# Altium PCB RPi_sensor_expansion_board.PcbDoc
Units mm, origin at the board's own origin, x right, y up, seen from the top; angles counter-clockwise.
Board outline 85.09 x 56.01 mm, 2 copper layers (Top Layer, Bottom Layer); 63 components, 60 nets, 293 pads, 133 vias.
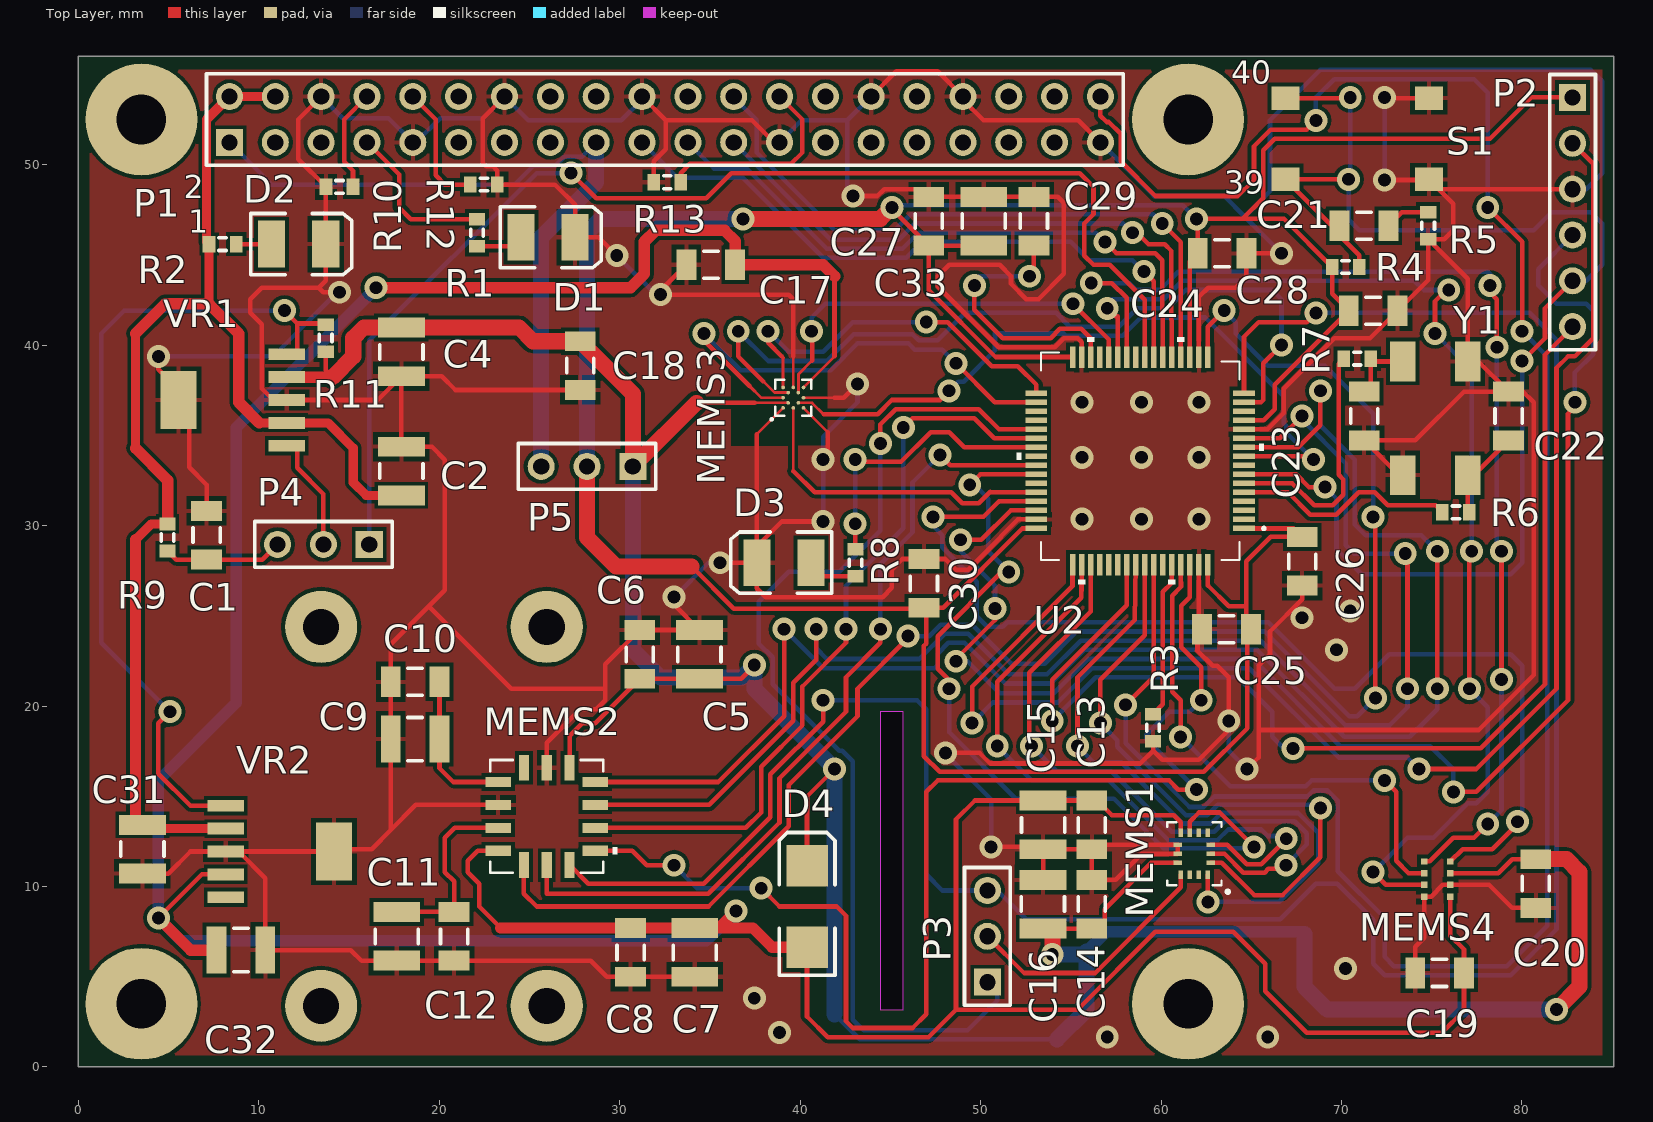
[diagram p0: Top Layer view]
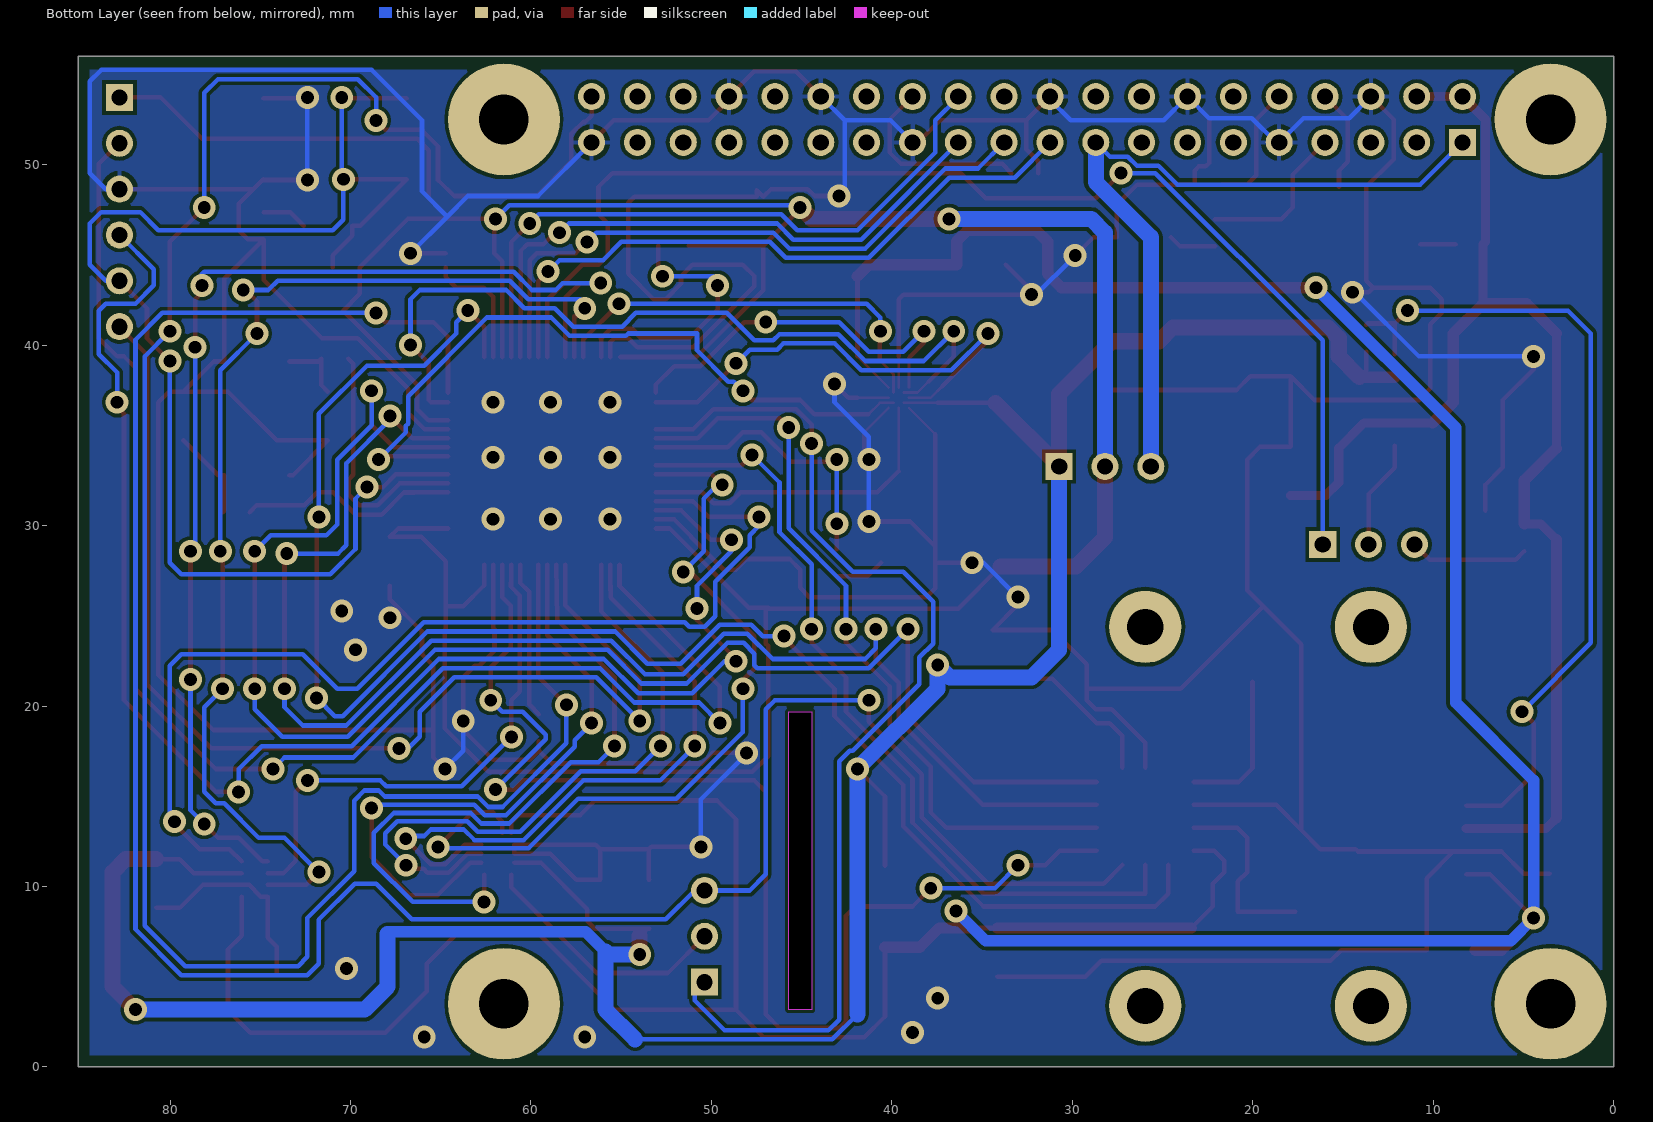
[diagram p1: Bottom Layer view, seen from below]

## Layer stack, top to bottom
Top Solder: solder mask 0.0102, Solder Resist, Dk 3.5
Top Layer: signal copper 0.0356
Dielectric 1: dielectric 0.32, FR-4, Dk 4.8
Bottom Layer: signal copper 0.0356
Bottom Solder: solder mask 0.0102, Solder Resist, Dk 3.5

## Board outline
0,0 85.09,0 85.09,56.007 0,56.007
cut-out: 44.45,3.175 45.72,3.175 45.72,19.685 44.45,19.685

## Design rules (kind name [scope] priority, off if disabled: settings)
Clearance [All] p1: gap=0.203 ignorepadtopadclearanceinfootprint=FALSE
HoleSize [All] p1: absolutevalues=TRUE maxlimit=4.978 minlimit=0.025 maxpercent=80.000 minpercent=20.000
MinimumSolderMaskSliver [All] p1: minsoldermaskwidth=0.091
PlaneConnect [All] p1: pad.planeconnectstyle=Relief pad.reliefexpansion=0.508 pad.reliefentries=4 pad.reliefconductorwidth=0.254 pad.reliefairgap=0.254 via.planeconnectstyle=Direct via.reliefexpansion=0.508 via.reliefentries=4 via.reliefconductorwidth=0.254 via.reliefairgap=0.254
PolygonConnect [All] p1: thpad.connectstyle=Relief thpad.reliefconductorwidth=0.254 thpad.reliefentries=4 thpad.polygonreliefangle="90 Angle" thpad.airgapwidth=0.254 smdpad.connectstyle=Relief smdpad.reliefconductorwidth=0.254 smdpad.reliefentries=4 smdpad.polygonreliefangle="90 Angle" smdpad.airgapwidth=0.254 via.connectstyle=Direct via.reliefconductorwidth=0.254 via.reliefentries=4 via.polygonreliefangle="90 Angle" via.airgapwidth=0.254
RoomDefinition Accelerometer [InComponentClass('Accelerometer')] p1 off: confinementstyle=ConfineIn formatcopy=TRUE lockcomponents=FALSE outline 0,0 50.8,0 50.8,25.4 0,25.4
RoutingVias [All] p1: holewidth=0.711 width=1.27 viastyle="Through Hole" minholewidth=0.711 minwidth=1.27 maxholewidth=0.711 maxwidth=1.27
SolderMaskExpansion [All] p1: expansion=0.051
Width [All] p1: maxlimit=0.889 minlimit=0.152 preferedwidth=0.254
27 further rules are at their usual default settings.

## Classes and differential pairs
component class top: P3 P5
component class STM32: C21 C22 C23 C24 C25 C26 C27 C28 C29 C30 C33 D3 P2 R3 R4 R5 R6 R7 R8 S1 U2 Y1
component class RPi_connector: D1 D2 P1 R1 R2 R10 R12 R13
component class Power: C1 C2 C4 C31 C32 D4 P4 R9 R11 VR1 VR2
component class Magnetometer: C17 C18 MEMS3
component class Gyroscope: C13 C14 C15 C16 MEMS1
component class barometer: C19 C20 MEMS4
component class Accelerometer: C5 C6 C7 C8 C9 C10 C11 C12 MEMS2

## Components (designator, comment, footprint, x,y, rotation, side; value= is the part's Value field where it differs from the comment)
C1 "Cap Semi" C1206 7.112,29.464 r270 top value=100nF
C2 "Cap Semi" C1210 17.907,33.02 r270 top value=10uF
C4 "Cap Semi" C1210 17.907,39.624 r90 top value=10uF
C5 "Cap Semi" C1210 34.417,22.86 r270 top value=1uF
C6 "Cap Semi" C1206 31.115,22.86 r270 top value=0.1uF
C7 "Cap Semi" C1210 34.163,6.35 r90 top value=1uF
C8 "Cap Semi" C1206 30.607,6.35 r90 top value=0.1uF
C9 "Cap Semi" C1210 18.669,18.161 r0 top value=1uF
C10 "Cap Semi" C1206 18.669,21.336 r0 top value=0.1uF
C11 "Cap Semi" C1210 17.653,7.239 r90 top value=1uF
C12 "Cap Semi" C1206 20.828,7.239 r90 top value=0.1uF
C13 "Cap Semi" C1206 56.171,13.415 r90 top value=100nF
C14 "Cap Semi" C1206 56.158,9.017 r270 top value=100nF
C15 "Cap Semi" C1210 53.467,13.415 r90 top value=1uF
C16 "Cap Semi" C1210 53.453,9.017 r270 top value=1uF
C17 "Cap Semi" C1206 35.052,44.45 r0 top value=100nF
C18 "Cap Semi" C1206 27.813,38.862 r90 top value=100nF
C19 "Cap Semi" C1206 75.438,5.207 r0 top value=0.1uF
C20 "Cap Semi" C1206 80.772,10.16 r90 top value=0.1uF
C21 "Cap Semi" C1206 71.247,46.609 r180 top value=100nF
C22 "Cap Semi" C1206 79.26,36.068 r270 top value=12pF
C23 "Cap Semi" C1206 71.259,36.068 r90 top value=12pF
C24 "Cap Semi" C1206 63.385,45.085 r0 top value=100nF
C25 "Cap Semi" C1206 63.627,24.257 r180 top value=100nF
C26 "Cap Semi" C1206 67.818,28.02 r270 top value=100nF
C27 "Cap Semi" C1206 47.129,46.863 r90 top value=100nF
C28 "Cap Semi" C1206 71.755,41.91 r0 top value=100nF
C29 "Cap Semi" C1206 52.959,46.863 r270 top value=4.7pF
C30 "Cap Semi" C1206 46.863,26.797 r270 top value=100nF
C31 "Cap Semi" C1210 3.556,12.065 r90 top value=10uF
C32 "Cap Semi" C1210 9.017,6.477 r180 top value=10uF
C33 "Cap Semi" C1210 50.177,46.863 r90 top value=10uF
D1 "LED3" 3.5X2.8X1.9 26.035,45.974 r0 top
D2 "LED3" 3.5X2.8X1.9 12.216,45.593 r0 top
D3 "LED3" 3.5X2.8X1.9 39.104,27.94 r180 top
D4 "D Schottky" SMB 40.386,8.89 r90 top
MEMS1 "BMG250" LGA14-BOSCH 61.849,11.811 r180 top
MEMS2 "ADXL355BEZ" E_14_1 25.962,13.884 r0 top value=Value
MEMS3 "BMA150" BGA12-BOSCH 39.624,37.084 r180 top
MEMS4 "DPS310" PG-VLGA-8-1 75.311,10.414 r90 top
P1 "Header 20X2" HDR2X20 8.382,51.232 r0 top
P2 "Header 6" HDR1X6 82.804,53.721 r270 top
P3 "SYNC_SEL" HDR1X3 50.379,4.699 r90 top
P4 "EN_SRC_SEL" HDR1X3 16.129,28.956 r180 top
P5 "UC_PWR_SEL" HDR1X3 30.734,33.274 r180 top
R1 "Res3" J1-0603 22.098,46.228 r90 top value=200
R2 "Res3" J1-0603 8.001,45.593 r180 top value=400
R3 "Res3" J1-0603 59.563,18.796 r90 top value=10K
R4 "Res3" J1-0603 70.231,44.323 r180 top value=4.7K
R5 "Res3" J1-0603 74.803,46.609 r90 top value=100R
R6 "Res3" J1-0603 76.339,30.734 r180 top value=0R
R7 "Res3" J1-0603 70.878,39.243 r180 top value=0R
R8 "Res3" J1-0603 43.065,27.94 r90 top value=200
R9 "Res3" J1-0603 4.953,29.337 r270 top value=10k
R10 "Res3" J1-0603 14.478,48.768 r180 top value=1K
R11 "Res3" J1-0603 13.716,40.386 r90 top value=10k
R12 "Res3" J1-0603 22.479,48.895 r0 top value=1K
R13 "Res3" J1-0603 32.639,49.022 r180 top value=1K
S1 "SW-DPST" TACT_SWITCH 70.866,51.435 r0 top
U2 "STM32F4x1R1" LQFP64-10x10mm 58.848,33.588 r180 top value=Value
VR1 "MCP1825" SOT-223-6 8.557,36.957 r90 top
VR2 "MCP1825" SOT-223-6 11.176,11.938 r270 top
Y1 "LFXTAL026380" 12SMX-B 75.196,35.941 r90 top

## Footprints (in the part's own frame and the unit in brackets; to place one, negate y for a bottom-side part, rotate by r counter-clockwise, add the part's x,y. Pads: shape width x height; smd on the part's side, far side on the other; paste and mask are expansions set on the pad)
3.5X2.8X1.9 [mm] "SM LED; 2 C-Bend Leads; Body 3.5 x 2.8 x 1.9 mm, inc leads (LxWxH typ)"
  rect 1.5x2.6 smd: 1(-1.5,0) 2(1.5,0)
  silkscreen extent -2.65,-1.7 2.95,1.7
12SMX-B [mm] "B-type 12SMX crystal package"
  rect 2.2x1.4 smd: 1(3.15,1.8) 2(3.15,-1.8) 3(-3.15,-1.8) 4(-3.15,1.8)
  body extent -3.5,-2.5 3.5,2.5, height 1.31
BGA12-BOSCH [mm]
  round 0.2 smd: A1(0.566,0.566) A3(0.566,0) A5(0.566,-0.566) B2(0.283,0.283) B4(0.283,-0.283) C1(0,0.566) C5(0,-0.566) D2(-0.283,0.283) D4(-0.283,-0.283) E1(-0.566,0.566) E3(-0.566,0) E5(-0.566,-0.566)
  silkscreen extent -1,-1 1.26,1.26, body extent -0.77,-0.78 0.78,0.78, height 0.65
C1206 [mm] "Chip Capacitor, Body 3.2x1.6mm, IPC High Density"
  rect 1.1x1.7 smd: 1(-1.35,0) 2(1.35,0)
  silkscreen extent -0.4,-0.75 0.4,0.75, body extent -1.7,-0.9 1.7,0.9, height 1.3
C1210 [mm] "Chip Capacitor, Body 3.2x2.5mm, IPC High Density"
  rect 1.1x2.6 smd: 1(-1.35,0) 2(1.35,0)
  silkscreen extent -0.4,-1.2 0.4,1.2, body extent -1.7,-1.35 1.7,1.35, height 1.3
E_14_1 [mil]
  rect 55.98x22 smd: 1(106.12,-75) 2(106.12,-25) 3(106.12,25) 4(106.12,75) 8(-106.12,75) 9(-106.12,25) 10(-106.12,-25) 11(-106.12,-75)
  rect 22x55.98 smd: 5(50,106.12) 6(0,106.12) 7(-50,106.12) 12(-50,-106.12) 13(0,-106.12) 14(50,-106.12)
  silkscreen extent -123,-123 154,123, body extent -118,-118 118,118, height 98
HDR1X3 [mm] "Connector; Header; 3 Position"
  rect 1.5x1.5 hole 0.9: 1(0,0)
  round 1.5 hole 0.9: 2(2.54,0) 3(5.08,0)
  silkscreen extent -1.27,-1.27 6.35,1.27
HDR1X6 [mm] "Connector; Header; 6 Position"
  rect 1.5x1.5 hole 0.9: 1(0,0)
  round 1.5 hole 0.9: 2(2.54,0) 3(5.08,0) 4(7.62,0) 5(10.16,0) 6(12.7,0)
  silkscreen extent -1.27,-1.27 13.97,1.27
HDR2X20 [mm] "Connector; Header; 20x2 Position"
  rect 1.5x1.5 hole 0.9: 1(0,0)
  round 1.5 hole 0.9: 2(0,2.54) 3(2.54,0) 4(2.54,2.54) 5(5.08,0) 6(5.08,2.54) 7(7.62,0) 8(7.62,2.54) 9(10.16,0) 10(10.16,2.54) 11(12.7,0) 12(12.7,2.54) 13(15.24,0) 14(15.24,2.54) 15(17.78,0) 16(17.78,2.54) 17(20.32,0) 18(20.32,2.54) 19(22.86,0) 20(22.86,2.54) 21(25.4,0) 22(25.4,2.54) 23(27.94,0) 24(27.94,2.54) 25(30.48,0) 26(30.48,2.54) 27(33.02,0) 28(33.02,2.54) 29(35.56,0) 30(35.56,2.54) 31(38.1,0) 32(38.1,2.54) 33(40.64,0) 34(40.64,2.54) 35(43.18,0) 36(43.18,2.54) 37(45.72,0) 38(45.72,2.54) 39(48.26,0) 40(48.26,2.54)
  silkscreen extent -1.27,-1.27 49.53,3.81
J1-0603 [mm] "Chip Resistor, Body 1.6x0.8mm, IPC High Density"
  rect 0.7x0.9 smd: 1(-0.75,0) 2(0.75,0)
  silkscreen extent -0.2,-0.35 0.2,0.35, body extent -0.85,-0.48 0.85,0.48, height 0.9
LGA14-BOSCH [mm]
  rect 0.25x0.475 smd: 1(-0.75,1.165) 2(-0.25,1.165) 3(0.25,1.165) 4(0.75,1.165) 8(0.75,-1.165) 9(0.25,-1.165) 10(-0.25,-1.165) 11(-0.75,-1.165)
  rect 0.475x0.25 smd: 5(0.915,0.5) 6(0.915,0) 7(0.915,-0.5) 12(-0.915,-0.5) 13(-0.915,0) 14(-0.915,0.5)
  silkscreen extent -1.9,-1.75 1.5,2.15, body extent -1.25,-1.5 1.25,1.5, height 1
LQFP64-10x10mm [mm]
  rect 1.194x0.305 smd: 1(-5.75,3.75) 2(-5.75,3.25) 3(-5.75,2.75) 4(-5.75,2.25) 5(-5.75,1.75) 6(-5.75,1.25) 7(-5.75,0.75) 8(-5.75,0.25) 9(-5.75,-0.25) 10(-5.75,-0.75) 11(-5.75,-1.25) 12(-5.75,-1.75) 13(-5.75,-2.25) 14(-5.75,-2.75) 15(-5.75,-3.25) 16(-5.75,-3.75) 33(5.75,-3.75) 34(5.75,-3.25) 35(5.75,-2.75) 36(5.75,-2.25) 37(5.75,-1.75) 38(5.75,-1.25) 39(5.75,-0.75) 40(5.75,-0.25) 41(5.75,0.25) 42(5.75,0.75) 43(5.75,1.25) 44(5.75,1.75) 45(5.75,2.25) 46(5.75,2.75) 47(5.75,3.25) 48(5.75,3.75)
  rect 0.305x1.194 smd: 17(-3.75,-5.75) 18(-3.25,-5.75) 19(-2.75,-5.75) 20(-2.25,-5.75) 21(-1.75,-5.75) 22(-1.25,-5.75) 23(-0.75,-5.75) 24(-0.25,-5.75) 25(0.25,-5.75) 26(0.75,-5.75) 27(1.25,-5.75) 28(1.75,-5.75) 29(2.25,-5.75) 30(2.75,-5.75) 31(3.25,-5.75) 32(3.75,-5.75) 49(3.75,5.75) 50(3.25,5.75) 51(2.75,5.75) 52(2.25,5.75) 53(1.75,5.75) 54(1.25,5.75) 55(0.75,5.75) 56(0.25,5.75) 57(-0.25,5.75) 58(-0.75,5.75) 59(-1.25,5.75) 60(-1.75,5.75) 61(-2.25,5.75) 62(-2.75,5.75) 63(-3.25,5.75) 64(-3.75,5.75)
  silkscreen extent -6.93,-6.85 6.85,6.85, body extent -6,-6 6,6, height 1.56
PG-VLGA-8-1 [mm]
  rect 0.35x0.35 smd: 1(-0.975,0.725) 2(-0.325,0.725) 3(0.325,0.725) 4(0.975,0.725) 5(0.975,-0.725) 6(0.325,-0.725) 7(-0.325,-0.725) 8(-0.975,-0.725)
  body extent -1.25,-1 1.25,1, height 1.08
SMB [mm] "DO-214-AA/SMB; 2 C-Bend Leads; Body 5.3 x 3.6 mm, inc. leads (LxW)"
  rect 2.3x2.3 smd: 1(-2.25,0) 2(2.25,0)
  silkscreen extent -3.8,-1.55 4.1,1.55
SOT-223-6 [mm]
  rect 0.65x2 smd: 1(-2.54,-3) 2(-1.27,-3) 3(0,-3) 4(1.27,-3) 5(2.54,-3)
  rect 3.2x2 smd: 6(0,3)
  body extent -3.27,-3.63 3.27,3.63, height 1.8
TACT_SWITCH [mm] "6x6 mm SMT tact switch footprint"
  rect 1.55x1.3 smd: 1(-3.975,2.25) 2(3.975,2.25) 3(-3.975,-2.25) 4(3.975,-2.25)
  body extent -4,-3.25 4,3.25, height 5

## Part data
C1 C2 C4 C5 C6 C7 C8 C9 C10 C11 C12 C13 C14 C15 C16 C17 C18 C19 C20 C21 C22 C23 C24 C25 C26 C27 C28 C29 C30 C31 C32 C33: "Capacitor (Semiconductor SIM Model)", LatestRevisionDate=29-May-2009, LatestRevisionNote="IPC-7351 Footprint Added.", PackageDescription="Chip Capacitor", PackageReference=C1206, Published=8-Jun-2000, Publisher="Altium Limited"
D1 D2 D3: "Typical BLUE SiC LED", DatasheetVersion=16-Apr-2002, LatestRevisionDate=17-Dec-2003, LatestRevisionNote="PCB Footprint replaced.", PackageDescription="SM LED; 2 C-Bend Leads; Body 3.5 x 2.8 x 1.9 mm, inc leads (LxWxH typ)", PackageReference=3.5X2.8X1.9, PackageVersion=16-Apr-2002, Published=8-Jun-2000, Publisher="Altium Limited"
D4: "Schottky Diode", Code_JEDEC=DO-214-AA, LatestRevisionDate=17-Jul-2002, LatestRevisionNote="Re-released for DXP Platform.", PackageDescription="DO-214-AA/SMB; 2 C-Bend Leads; Body 5.3 x 3.6 mm, inc. leads (LxW)", PackageReference=SMB, Published=8-Jun-2000, Publisher="Altium Limited"
MEMS2: "Imported", RefDes=RefDes, Type=Type
P1: "Header, 20-Pin, Dual row", LatestRevisionDate=17-Jul-2002, LatestRevisionNote="Re-released for DXP Platform.", Publisher="Altium Limited"
P2: "Header, 6-Pin", LatestRevisionDate=17-Jul-2002, LatestRevisionNote="Re-released for DXP Platform.", Publisher="Altium Limited"
P3 P4 P5: library part "Header 3", "Header, 3-Pin", LatestRevisionDate=17-Jul-2002, LatestRevisionNote="Re-released for DXP Platform.", Publisher="Altium Limited"
R1 R2 R3 R4 R5 R6 R7 R8 R9 R10 R11 R12 R13: "Resistor", LatestRevisionDate=29-May-2009, LatestRevisionNote="IPC-7351 Footprint Added.", PackageDescription="Chip Resistor", PackageReference=J1-0603, Published=8-Jun-2000, Publisher="Altium Limited"
S1: "Double-Pole, Single-Throw Switch", LatestRevisionDate=17-Jul-2002, LatestRevisionNote="Re-released for DXP Platform.", PackageDescription="Switch; 4 Leads", PackageReference=DPST-4, Published=24-Mar-1999, Publisher="Altium Limited"
U2: "Imported", Manufacturer_Part_Number=stm32f4x1r1, C="Copyright (C) 2016 Accelerated Designs. All rights reserved", Copyright="Copyright (C) 2016 Accelerated Designs. All rights reserved", RefDes=RefDes, Type=Type, Vendor=STMicroelectronics
VR1 VR2: "3.3V Voltage regulator"

## Free pads (board coordinates)
  round 4 hole 2: 7(13.462,3.384) 8(25.962,3.384) 9(13.462,24.384) 10(25.962,24.384)
  round 6.2 hole 2.75: 11(3.5,3.5) 12(3.5,52.5) 13(61.5,52.5) 14(61.5,3.5)

## Via types
v1: diameter 1.27, hole 0.711, Top Layer to Bottom Layer, tented both sides, 100 vias
v2: diameter 1.27, hole 0.711, Top Layer to Bottom Layer, 17 vias
v3: diameter 1.27, hole 0.711, Top Layer to Bottom Layer, tented bottom, 16 vias

## Nets (pads, with @x,y where several pads share a name; then routed paths per layer and width w, separated by ;. In a path a pad name is that pad's centre, name@x,y a point inside that pad or via, vN(x,y) a via of type N, cw(c..) or ccw(c..) an arc to the next point about the centre after c; other vN are vias at no path point)
3V3_ANALOG: C7.2 C8.2 C13.2 C15.2 C17.2 C19.2 C32.2 D4.1 MEMS1.8 MEMS2.11 MEMS3.E5 MEMS4.8 VR2.4 | length 221.4
  Top Layer w0.152: MEMS3.E5 41.91,39.37
  Top Layer w0.254: v1(4.445,8.255) 6.858,10.668 VR2.4 ; MEMS2.11 22.139,11.979 21.59,11.43 21.59,10.795 22.225,10.16 22.225,8.89 23.415,7.7 ; C7.2 35.513,7.7 ; D4.1 40.386,2.794 41.529,1.651 47.117,1.651 48.641,3.175 ; 41.91,39.37 41.91,43.815 ; MEMS1.8 61.099,13.567 60.712,13.955 57.282,13.955 56.471,14.765 C13.2 C15.2 49.69,14.765 48.641,13.716 48.641,11.724 48.641,3.175 ; MEMS4.8 76.036,7.276 76.788,6.524 C19.2 76.788,3.128 75.565,1.905 68.072,1.905 65.786,4.191 65.786,5.715 64.008,7.493 59.69,7.493 55.372,3.175 48.641,3.175
  Top Layer w0.635: v1(4.445,8.255) 6.223,6.477 C32.2 ; v1(16.51,43.18) 30.607,43.18 31.369,43.942 31.369,45.72 32.004,46.355 35.814,46.355 36.402,45.767 C17.2 41.275,44.45 41.91,43.815 ; 23.415,7.7 C8.2 C7.2 ; v1(36.449,8.636) 35.513,7.7 37.385,7.7 38.445,6.64 D4.1
  Bottom Layer w0.635: v1(16.51,43.18) 8.763,35.433 8.763,20.193 4.445,15.875 v1(4.445,8.255) 5.715,6.985 34.798,6.985 v1(36.449,8.636)
3V3_DIGITAL: C4.2 C5.2 C6.2 C14.2 C16.2 C18.2 C20.2 D4.2 MEMS1.5 MEMS2.5 MEMS3.B2 MEMS4.6 P5.1 R11.1 VR1.4 | length 173.6
  Top Layer w0.152: 37.494,36.801 MEMS3.B2
  Top Layer w0.254: R11.1 13.716,38.608 14.097,38.227 ; MEMS2.5 27.232,18.342 27.94,19.05 28.655,19.05 C6.2 C5.2 36.75,21.51 37.465,22.225 v1(37.465,22.273) ; 34.261,36.801 37.494,36.801 ; D4.2 40.386,14.986 v3(41.91,16.51) ; C16.2 C16.2@53.552,7.667 ; C16.2@53.975,7.244 C16.2@53.552,7.667 ; MEMS1.5 59.444,11.311 56.881,8.748 56.881,8.09 56.458,7.667 C14.2 C16.2@53.552,7.667 ; MEMS4.6 78.684,10.739 79.455,11.51 C20.2
  Top Layer w0.635: VR1.4@12.144,38.227 14.097,38.227
  Top Layer w0.889: 14.097,38.227 15.24,39.37 15.24,40.386 15.828,40.974 C4.2 24.431,40.974 25.193,40.212 C18.2 30.734,37.291 P5.1 34.261,36.801 ; v2(53.975,6.223) C16.2@53.975,7.244 ; C20.2 82.47,11.51 83.185,10.795 83.185,4.445 v1(81.915,3.175)
  Bottom Layer w0.254: 41.91,2.921 43.307,1.524 54.229,1.524 ; 55.696,6.223 55.88,6.407 ; 67.945,7.366 67.945,7.493
  Bottom Layer w0.635: 55.88,6.407 56.966,7.493 67.945,7.493
  Bottom Layer w0.889: P5.1 30.734,23.114 32.258,21.59 36.782,21.59 v1(37.465,22.273) 37.465,20.955 v3(41.91,16.51) 41.91,2.921 ; v2(53.975,6.223) 55.696,6.223 ; 54.229,1.524 55.88,3.175 55.88,6.407 ; 67.945,7.366 67.945,4.445 69.215,3.175 v1(81.915,3.175)
5V_IN: C2.2 C31.2 P1.2 P1.4 R2.2 R9.1 VR1.2 VR2.2 | length 71.9
  Top Layer w0.508: C31.2@3.175,13.796 C31.2 3.763,13.208 VR2.2 ; 3.175,29.21 4.052,30.087 R9.1 ; 3.175,34.29 3.175,40.64 ; 7.251,42.279 R2.2 7.112,45.732 7.112,52.502 P1.2 P1.4 ; 10.033,35.687 12.144,35.687 13.843,35.687 15.24,34.29 15.24,32.385 15.955,31.67 C2.2
  Top Layer w0.635: C31.2@3.175,13.796 3.175,29.21 ; 3.175,34.29 4.953,32.512 R9.1 ; 3.175,40.64 4.814,42.279 7.251,42.279 8.89,40.64 8.89,36.83 10.033,35.687
GND: C1.1 C2.1 C4.1 C5.1 C6.1 C7.1 C8.1 C9.1 C10.1 C11.1 C12.1 C13.1 C14.1 C15.1 C16.1 C17.1 C18.1 C19.1 C20.1 C22.1 C23.1 C24.2 C25.2 C26.2 C27.2 C28.2 C29.1 C30.1 C31.1 C32.1 C33.2 D1.2 D2.2 D3.2 MEMS1.6 MEMS1.7 MEMS2.6 MEMS2.9 MEMS3.A1 MEMS3.C5 MEMS3.E1 MEMS3.E3 MEMS4.1 MEMS4.7 P1.6 P1.9 P1.14 P1.20 P1.25 P1.30 P1.34 P1.39 P2.3 R3.1 R5.1 R10.2 R12.2 R13.2 S1.2 S1.4 U2.12 U2.18 U2.31 U2.47 U2.63 VR1.3 VR1.6 VR2.3 VR2.6 Y1.2 Y1.4 | length 581
  Top Layer w0.152: 37.604,35.064 MEMS3.A1 ; MEMS3.C5 39.624,39.37 ; MEMS3.E1 41.529,35.179 ; MEMS3.E3 41.91,37.084
  Top Layer w0.254: C31.1 5,10.715 6.223,11.938 VR2.3 VR2.3@8.89,11.938 ; v1(4.445,39.37) 4.445,38.656 6.144,36.957 6.144,33.226 7.112,32.258 C1.1 ; P1.6 12.192,52.502 12.192,50.304 R10.2 13.728,45.605 D2.2 13.716,43.561 13.335,43.18 ; v1(14.478,42.926) 13.589,42.926 13.335,43.18 ; MEMS2.9 18.71,14.519 17.319,13.128 ; P1.14 22.428,52.578 22.428,50.089 22.606,49.911 22.987,49.911 23.229,49.669 R12.2 26.416,48.895 27.535,47.776 D1.2 28.829,45.974 v1(29.845,44.958) ; MEMS2.6 25.962,17.961 27.815,19.814 28.7,19.814 29.21,20.323 29.21,20.955 ; C18.1 20.908,37.512 20.146,38.274 C4.1 ; P1.20 32.563,52.451 ; 31.889,49.53 31.889,50.177 32.563,50.851 32.563,52.451 ; v1(33.02,26.035) 33.02,25.607 C5.1 C6.1 29.21,22.305 29.21,20.955 ; C17.1 32.258,43.006 v1(32.258,42.799) 39.37,42.799 39.624,42.545 39.624,39.37 ; C7.1 C8.1 29.29,5 28.401,5.889 C12.1 C11.1 15.701,5.889 15.113,6.477 C32.1 10.367,10.461 VR2.3@8.89,11.938 ; v1(35.56,27.94) D3.2 ; 37.604,35.064 D3.2@37.604,28.841 ; P1.25@38.557,51.232 37.338,52.451 32.563,52.451 ; v1(41.275,30.226) 38.989,30.226 D3.2@37.604,28.841 ; v1(41.275,33.655) 41.529,33.909 41.529,35.179 ; 41.91,37.084 42.418,37.084 v1(43.18,37.846) ; v1(42.926,48.26) 44.283,48.26 44.664,48.641 46.701,48.641 C27.2 47.498,48.582 47.498,48.213 C33.2 C29.1 54.276,48.213 54.61,47.879 54.61,43.942 53.213,42.545 52.538,42.545 51.689,43.394 51.689,43.815 51.054,44.45 48.26,44.45 47.637,43.827 47.637,43.251 51.01,39.878 54.102,39.878 54.61,40.386 55.372,40.386 55.598,40.16 U2.31 ; P1.30 45.339,55.169 47.625,55.169 P1.34 49.022,53.594 50.165,52.451 55.423,52.451 P1.39 ; v2(48.053,17.399) 49.943,17.399 50.527,16.815 58.852,16.815 59.563,17.526 ; v2(50.585,12.192) 53.34,12.192 C15.1 ; 52.055,30.33 52.047,30.33 51.139,29.422 51.139,29.379 49.32,27.559 48.641,27.559 48.053,28.147 C30.1 45.673,28.147 45.085,27.559 45.085,26.543 44.577,26.035 38.1,26.035 37.604,26.531 D3.2 ; 52.055,30.338 U2.47 ; C16.1 53.467,10.381 C15.1 ; R3.1 59.563,17.526 ; U2.63 62.098,24.332 62.023,24.257 62.023,23.067 62.865,22.225 63.119,22.225 63.754,21.59 v1(63.754,19.177) 63.754,18.669 62.103,17.018 60.071,17.018 59.563,17.526 ; U2.18 62.098,42.667 62.611,43.18 64.135,43.18 64.735,43.78 C24.2@64.735,44.323 ; U2.12 65.901,35.338 66.802,36.239 66.802,37.589 69.599,40.386 71.581,40.386 C28.2 74.803,43.608 R5.1 ; C24.2 v1(66.675,45.085) ; v1(64.77,16.51) 65.405,17.145 65.405,18.669 ; C26.2 67.818,25.908 66.04,24.13 66.04,22.86 65.405,22.225 65.405,18.669 ; v1(72.39,49.149) 74.805,49.149 S1.4 S1.4@75.385,48.641 ; v1(72.39,53.721) 72.426,53.685 S1.2 ; Y1.4 73.186,32.791 C23.1 74.088,34.718 76.788,37.418 C22.1 ; C19.1 74.088,6.651 74.586,7.149 MEMS4.1 74.971,9.439 75.621,10.089 MEMS4.7 78.176,10.089 79.455,8.81 C20.1 ; P2.3 S1.4@75.385,48.641 ; VR2.3@8.89,11.938 VR2.6 14.303,12.065 16.256,12.065 17.319,13.128 ; 13.335,43.18 10.16,43.18 9.525,42.545 9.525,41.783 10.16,41.148 10.16,37.592 10.795,36.957 16.59,36.957 C4.1 ; 17.319,13.128 C9.1 C10.1 17.319,23.415 19.431,25.527 ; C4.1 C2.1 19.605,34.37 20.32,33.655 20.32,26.416 19.431,25.527 ; 19.431,25.527 24.003,20.955 29.21,20.955 ; D3.2 D3.2@37.604,28.841 ; C15.1 C13.1 ; C13.1 56.171,10.381 C14.1 57.484,10.367 58.928,11.811 MEMS1.6 MEMS1.7 56.417,12.311 C13.1 ; 65.405,18.669 77.597,18.669 80.645,21.717 80.645,36.83 80.057,37.418 C22.1 ; R5.1 75.704,45.859 76.2,46.355 76.2,47.826 S1.4@75.385,48.641 ; R5.1 76.996,43.666 Y1.2 77.587,39.091 C22.1
  Bottom Layer w0.254: v1(4.445,39.37) 10.795,39.37 14.351,42.926 v1(14.478,42.926) ; P1.6 14.656,52.578 17.196,52.578 P1.9 18.72,51.232 20.066,52.578 22.428,52.578 P1.14 24.943,52.451 30.099,52.451 31.242,53.594 P1.20 ; v1(29.845,44.958) 32.131,42.672 v1(32.258,42.799) ; v1(33.02,26.035) 34.925,27.94 v1(35.56,27.94) ; P1.25@38.557,51.232 P1.25 40.081,52.451 42.621,52.451 ; v1(41.275,30.226) v1(41.275,33.655) 41.275,34.925 43.18,36.83 v1(43.18,37.846) ; v1(42.926,48.26) 42.621,48.565 42.621,52.451 ; P1.30 42.621,52.451 ; v2(48.053,17.399) 48.133,17.319 48.133,17.272 50.585,14.82 v2(50.585,12.192) ; P1.39 59.614,48.26 63.5,48.26 64.643,47.117 ; v1(63.754,19.177) 63.754,17.526 v1(64.77,16.51) ; v1(66.675,45.085) 64.643,47.117 ; v1(72.39,49.149) v1(72.39,53.721) ; P2.3 83.566,48.641 84.455,49.53 84.455,54.61 83.82,55.245 68.834,55.245 66.04,52.451 66.04,48.514 64.643,47.117
  other v1: 57.023,1.651 65.913,1.651 38.862,1.905 37.465,3.81 70.231,5.461 69.723,23.114 67.818,24.892 70.485,25.273
  other v2: 55.626,30.353 58.928,30.353 62.103,30.353 55.626,33.782 58.928,33.782 62.103,33.782 55.626,36.83 58.928,36.83 62.103,36.83
GYRO_CS: MEMS1.12 U2.50 | length 36.1
  Top Layer w0.254: v1(50.927,17.78) 50.927,21.336 55.59,25.999 55.59,26.67 ; 55.598,26.388 U2.50 ; MEMS1.12 63.667,12.311 64.751,11.227 65.551,11.227 66.939,12.615 v2(66.939,12.649)
  Bottom Layer w0.254: v1(50.927,17.78) 52.832,15.875 57.095,15.875 60.397,12.573 63.133,12.573 63.718,13.157 65.551,13.157 65.913,12.795 66.793,12.795 v2(66.939,12.649)
GYRO_INT2: MEMS1.9 U2.42 | length 45.7
  Top Layer w0.254: v1(48.26,20.955) 48.26,21.423 47.625,22.058 47.625,23.876 51.181,27.432 v1(51.562,27.432) ; v1(49.403,32.258) 49.975,32.83 49.983,32.83 ; 49.983,32.838 U2.42 ; MEMS1.9 MEMS1.9 61.6,13.594 62.103,14.097 63.246,14.097 v2(65.151,12.192)
  Bottom Layer w0.254: v1(48.26,20.955) 48.26,18.557 51.958,14.859 57.392,14.859 60.136,12.116 65.075,12.116 v2(65.151,12.192) ; v1(49.403,32.258) 49.53,32.385 50.419,31.496 50.419,28.575 v1(51.562,27.432)
GYRO_MISO: MEMS1.1 U2.56 | length 37.4
  Top Layer w0.254: v1(55.372,17.78) 55.372,21.59 58.547,24.765 U2.56 ; v2(62.598,9.144) MEMS1.1
  Bottom Layer w0.254: v1(55.372,17.78) 56.261,16.891 57.794,16.891 61.197,13.487 62.755,13.487 63.339,14.072 67.607,14.072 68.707,12.971 68.707,11.296 66.555,9.144 v2(62.598,9.144)
GYRO_MOSI: MEMS1.14 U2.57 | length 35
  Top Layer w0.254: v1(56.642,19.05) 56.642,21.463 59.098,23.919 U2.57 ; MEMS1.14 63.373,11.311 65.159,9.525 66.735,9.525 68.834,11.624 v2(68.834,14.351)
  Bottom Layer w0.254: v1(56.642,19.05) 57.582,18.11 57.582,17.75 61.387,13.945 62.565,13.945 63.149,14.529 68.656,14.529 v2(68.834,14.351)
GYRO_SCLK: MEMS1.13 U2.51 | length 36.3
  Top Layer w0.254: v1(52.832,17.78) 52.705,17.907 52.705,21.844 56.098,25.237 U2.51 ; MEMS1.13 63.52,11.811 64.562,10.77 65.74,10.77 65.952,10.982 66.735,10.982 v2(66.929,11.176)
  Bottom Layer w0.254: v1(52.832,17.78) 54.229,16.383 57.233,16.383 60.586,13.03 62.944,13.03 63.528,13.614 67.417,13.614 68.078,12.954 68.078,12.325 v2(66.929,11.176)
NetC1_2: C1.2 P4.3 R9.2 | length 6.6
  Top Layer w0.254: R9.2 5.426,28.114 C1.2 10.207,28.114 P4.3
NetC9_2: C9.2 C10.2 MEMS2.8 | length 8.3
  Top Layer w0.254: C10.2 C9.2 20.019,16.557 20.787,15.789 MEMS2.8
NetC11_2: C11.2 C12.2 MEMS2.10 | length 10.7
  Top Layer w0.254: C11.2 C12.2 20.828,10.287 20.32,10.795 20.32,12.7 20.869,13.249 MEMS2.10
NetC21_1: C21.1 R5.2 | length 2.5
  Top Layer w0.254: C21.1 73.347,47.359 R5.2
NetC22_2: C22.2 R6.1 Y1.3 | length 5.2
  Top Layer w0.254: R6.1 76.996,30.827 Y1.3 77.333,32.791 C22.2
NetC23_2: C23.2 R7.1 Y1.1 | length 3.8
  Top Layer w0.254: C23.2 71.628,37.787 R7.1 71.78,39.091 Y1.1
NetC29_2: C29.2 U2.30 | length 15.2
  Top Layer w0.254: v1(49.657,43.307) 49.657,41.95 51.221,40.386 53.892,40.386 54.4,40.894 55.582,40.894 56.134,40.342 56.098,40.306 U2.30 ; v1(52.705,43.815) 52.959,44.069 C29.2
  Bottom Layer w0.254: v1(49.657,43.307) 49.657,43.561 49.911,43.815 v1(52.705,43.815)
NetD1_1: D1.1 R1.1 | length 2.6
  Top Layer w0.254: R1.1 24.039,45.478 D1.1
NetD2_1: D2.1 R2.1 | length 2
  Top Layer w0.254: R2.1 D2.1
NetD3_1: D3.1 R8.1 | length 2.8
  Top Layer w0.254: D3.1 41.354,27.19 R8.1
NetMEMS1_4: MEMS1.4 P3.2 | length 14.2
  Top Layer w0.254: P3.2 52.411,5.207 56.352,5.207 61.099,9.954 MEMS1.4
NetMEMS2_1: MEMS2.1 U2.62 | length 70.1
  Top Layer w0.254: MEMS2.1 30.693,11.979 31.496,11.176 v3(33.02,11.176) ; v1(37.846,9.906) 38.862,8.89 42.037,8.89 42.545,8.382 42.545,2.54 42.926,2.159 46.228,2.159 46.99,2.921 46.99,15.24 47.625,15.875 60.452,15.875 60.96,15.367 v1(61.976,15.367) ; 61.59,26.038 61.59,26.03 61.122,25.562 61.122,23.25 62.23,22.142 v1(62.23,20.32) ; 61.598,26.038 U2.62
  Bottom Layer w0.254: v3(33.02,11.176) 34.29,9.906 v1(37.846,9.906) ; v1(61.976,15.367) 59.182,18.161 59.182,18.415 60.452,19.685 61.595,19.685 v1(62.23,20.32)
NetMEMS2_2: MEMS2.2 U2.38 | length 42.2
  Top Layer w0.254: MEMS2.2 36.998,13.249 37.846,14.097 37.846,16.637 40.132,18.923 40.132,21.082 42.545,23.495 v3(42.545,24.257) ; v1(45.72,35.433) 46.228,35.941 49.657,35.941 50.76,34.838 U2.38
  Bottom Layer w0.254: v3(42.545,24.257) 42.545,26.67 45.72,29.845 v1(45.72,35.433)
NetMEMS2_3: MEMS2.3 U2.11 | length 81.2
  Top Layer w0.254: MEMS2.3 34.966,14.519 39.624,19.177 39.624,21.292 40.894,22.562 v3(40.894,24.257) ; U2.11 66.588,34.838 v1(67.818,36.068) ; v1(73.533,28.448) 73.66,28.321 v1(73.66,20.955)
  Bottom Layer w0.254: v3(40.894,24.257) 40.894,23.197 41.485,22.606 46.613,22.606 48.01,24.003 49.323,24.003 51.569,21.757 53.681,21.757 55.546,23.622 65.528,23.622 70.229,18.921 72.642,18.921 73.66,19.939 v1(73.66,20.955) ; v1(67.818,36.068) 67.818,35.854 70.231,33.441 70.231,28.912 70.695,28.448 v1(73.533,28.448)
NetMEMS2_4: MEMS2.4 U2.10 | length 88
  Top Layer w0.254: MEMS2.4 35.474,15.789 39.116,19.431 v3(39.116,24.257) ; U2.10 67.612,34.338 68.834,35.56 v1(68.834,37.465) ; v1(75.311,20.955) v1(75.311,28.575)
  Bottom Layer w0.254: v3(39.116,24.257) 41.275,22.098 47.458,22.098 47.625,22.265 47.625,22.9 48.22,23.495 49.113,23.495 51.359,21.249 53.892,21.249 55.757,23.114 65.318,23.114 70.144,18.288 73.787,18.288 75.311,19.812 v1(75.311,20.955) ; v1(68.834,37.465) 68.834,35.556 70.739,33.651 70.739,30.059 71.334,29.464 74.422,29.464 v1(75.311,28.575)
NetMEMS2_12: MEMS2.12 U2.17 | length 91.6
  Top Layer w0.254: MEMS2.12 24.692,9.598 25.4,8.89 34.925,8.89 39.37,13.335 39.37,15.621 43.18,19.431 43.18,20.955 45.974,23.749 v3(45.974,23.876) ; U2.17 62.598,41.008 v1(63.5,41.91) ; v1(71.755,30.48) 71.882,30.353 v1(71.882,20.447)
  Bottom Layer w0.254: v3(45.974,23.876) 47.164,23.876 47.799,24.511 49.534,24.511 51.693,22.352 53.558,22.352 55.336,24.13 65.739,24.13 70.44,19.429 70.864,19.429 v1(71.882,20.447) ; v1(63.5,41.91) 64.135,41.275 64.135,40.64 65.913,38.862 69.088,38.862 71.755,36.195 v1(71.755,30.48)
NetMEMS2_13: MEMS2.13 U2.41 | length 46.1
  Top Layer w0.254: MEMS2.13 25.962,9.598 34.915,9.598 38.862,13.545 38.862,16.002 42.545,19.685 42.545,21.59 44.45,23.495 v3(44.45,24.257) ; v1@47.752,33.529 v1(47.752,33.909) 48.323,33.338 U2.41
  Bottom Layer w0.254: v3(44.45,24.257) 44.45,27.857 46.228,29.635 46.228,32.385 v1(47.752,33.909)
NetMEMS2_14: MEMS2.14 P3.3 U2.16 | length 132
  Top Layer w0.254: MEMS2.14 28.261,10.16 34.671,10.16 38.354,13.843 38.354,16.212 41.275,19.133 v3(41.275,20.32) ; U2.16@64.598,37.371 64.598,40.468 65.405,41.275 68.072,41.275 v1(68.58,41.783) v1@68.072,41.783
  Bottom Layer w0.254: v3(41.275,20.32) 46.482,20.32 46.99,19.812 46.99,10.668 47.879,9.779 49.443,9.779 50.927,9.779 52.527,8.179 66.599,8.179 68.58,10.16 69.763,10.16 71.755,8.168 71.755,5.715 72.39,5.08 79.375,5.08 81.915,7.62 81.915,40.299 80.431,41.783 v1(68.58,41.783)
NetMEMS3_A3: MEMS3.A3 U2.34 | length 27.3
  Top Layer w0.152: 37.211,37.719 37.846,37.084 MEMS3.A3
  Top Layer w0.254: v3(34.671,40.64) 34.671,40.259 37.211,37.719 ; v1(48.641,38.989) 50.792,36.838 U2.34
  Bottom Layer w0.254: v3(34.671,40.64) 36.703,38.608 41.696,38.608 43.178,40.09 46.019,40.09 46.359,39.751 47.879,39.751 v1(48.641,38.989)
NetMEMS3_A5: MEMS3.A5 U2.33 | length 21.4
  Top Layer w0.152: MEMS3.A5 39.058,39.301
  Top Layer w0.203: 38.989,39.37 39.058,39.301
  Top Layer w0.254: v3(38.227,40.767) 38.227,40.132 38.989,39.37 ; v1(46.99,41.275) 48.177,41.275 50.622,38.83 52.07,38.83 53.098,37.802 U2.33@53.098,37.371
  Bottom Layer w0.254: v3(38.227,40.767) 39.37,39.624 41.275,39.624 42.926,41.275 v1(46.99,41.275)
NetMEMS3_B4: MEMS3.B4 U2.15 | length 45.6
  Top Layer w0.152: 37.944,38.002 38.579,37.367 MEMS3.B4
  Top Layer w0.254: v3(36.576,40.767) 36.576,39.37 37.944,38.002 ; U2.15 65.54,36.838 65.659,36.957 65.659,38.989 v1(66.675,40.005)
  Bottom Layer w0.254: v3(36.576,40.767) 38.227,39.116 41.485,39.116 42.968,40.598 46.23,40.598 46.569,40.259 47.625,40.259 49.149,41.783 54.189,41.783 54.951,41.021 57.658,41.021 58.674,42.037 60.365,42.037 61.381,43.053 66.167,43.053 66.675,42.545 v1(66.675,40.005)
NetMEMS3_C1: MEMS3.C1 U2.44 | length 18
  Top Layer w0.152: 39.624,33.02 MEMS3.C1
  Top Layer w0.254: 39.624,33.02 40.806,31.838 48.386,31.838 48.982,31.242 49.911,31.242 50.546,31.877 50.585,31.838 U2.44
NetMEMS3_D2: MEMS3.D2 U2.9 | length 40
  Top Layer w0.152: MEMS3.D2 40.669,36.801 41.304,36.166
  Top Layer w0.254: 41.304,36.166 44.298,36.166 45.089,36.957 47.752,36.957 v1(48.26,37.465) ; U2.9 68.27,33.838 v1(68.453,33.655)
  Bottom Layer w0.254: v1(48.26,37.465) 48.768,37.973 49.062,37.973 50.8,39.711 50.8,40.64 54.614,40.64 54.741,40.513 57.868,40.513 58.884,41.529 62.444,41.529 66.802,37.171 66.802,35.647 66.929,35.52 66.929,35.179 v1(68.453,33.655)
NetMEMS3_D4: MEMS3.D4 U2.28 | length 23.1
  Top Layer w0.152: MEMS3.D4 39.907,38.383 40.669,39.145
  Top Layer w0.254: v3(40.64,40.767) 40.669,40.738 40.669,39.145 ; v1(55.118,42.291) 57.098,40.311 U2.28
  Bottom Layer w0.254: v3(40.64,40.767) 40.64,41.529 41.402,42.291 v1(55.118,42.291)
NetMEMS4_2: MEMS4.2 U2.27 | length 64
  Top Layer w0.254: v1(57.023,42.037) 57.471,41.589 57.59,41.589 ; U2.27 57.598,41.589 ; v3(71.755,10.795) 72.461,10.089 MEMS4.2 ; v1(75.184,40.64) 75.184,42.418 75.819,43.053 v1(75.946,43.053) ; v1(77.089,20.955) 77.089,28.448 v1(77.216,28.575)
  Bottom Layer w0.254: v1(57.023,42.037) 57.023,42.291 57.277,42.545 60.154,42.545 61.17,43.561 74.041,43.561 74.549,43.053 v1(75.946,43.053) ; v3(71.755,10.795) 73.66,12.7 75.097,12.7 77.002,14.605 77.47,14.605 78.105,15.24 78.105,19.939 v1(77.089,20.955) v1@76.835,20.955 ; v1(75.184,40.64) 77.216,38.608 v1(77.216,28.575)
NetMEMS4_3: MEMS4.3 U2.61 | length 29.1
  Top Layer w0.254: v1(61.087,18.288) 61.087,20.32 60.614,20.793 60.614,26.114 61.106,26.606 61.106,26.86 ; 61.098,26.808 U2.61 ; v3(72.39,15.875) 73.025,15.24 73.025,11.43 73.716,10.739 MEMS4.3
  Bottom Layer w0.254: v1(61.087,18.288) 63.83,15.545 68.016,15.545 68.346,15.875 v3(72.39,15.875)
NetMEMS4_4: MEMS4.4 U2.26 | length 64.3
  Top Layer w0.254: v1(56.134,43.434) 57.277,43.434 58.098,42.613 U2.26 ; MEMS4.4 74.889,11.389 76.2,12.7 77.343,12.7 v3(78.105,13.462) v3@78.105,13.97 ; v1(78.232,43.307) 78.232,42.926 78.613,42.545 v1(78.613,39.878) ; v1(78.867,21.463) v1(78.867,28.575)
  Bottom Layer w0.254: v1(56.134,43.434) 58.253,43.434 58.634,43.053 59.944,43.053 60.96,44.069 78.105,44.069 78.232,43.942 v1(78.232,43.307) ; v3(78.105,13.462) 78.867,14.224 v1(78.867,21.463) ; v1(78.613,39.878) 78.613,28.829 v1(78.867,28.575)
NetMEMS4_5: MEMS4.5 U2.45 | length 59.4
  Top Layer w0.254: v1(47.371,30.48) 50.165,30.48 51.015,31.33 51.023,31.33 ; 51.023,31.338 U2.45 ; MEMS4.5 76.712,12.065 78.359,12.065 79.883,13.589 v3(79.756,13.589)
  Bottom Layer w0.254: v1(47.371,30.48) 47.371,29.972 47.879,29.464 47.879,28.789 49.784,26.884 49.784,24.979 50.379,24.384 51.221,24.384 51.475,24.638 65.949,24.638 69.632,20.955 70.739,20.955 72.644,22.86 79.375,22.86 80.01,22.225 80.01,13.843 v3(79.756,13.589)
NetP1_19: P1.19 U2.23 | length 36.5
  Top Layer w0.254: v1(59.055,44.069) 59.598,43.526 U2.23
  Bottom Layer w0.254: P1.19 33.198,49.276 36.834,49.276 41.279,44.831 45.887,44.831 46.776,45.72 54.991,45.72 56.007,44.704 58.42,44.704 v1(59.055,44.069)
NetP1_21: P1.21 U2.22 | length 35.5
  Top Layer w0.254: v1@56.896,45.339 v1(56.896,45.72) 57.531,45.085 59.69,45.085 60.071,44.704 60.071,41.783 60.098,41.756 U2.22
  Bottom Layer w0.254: P1.21 35.23,49.784 37.044,49.784 41.489,45.339 45.676,45.339 46.565,46.228 56.388,46.228 v1(56.896,45.72)
NetP1_23: P1.23 U2.21 | length 33.4
  Top Layer w0.254: P1.23@36.322,51.225 P1.23 ; v1(58.42,46.228) 58.67,46.228 59.305,45.593 60.198,45.593 60.579,45.212 60.579,41.402 60.598,41.383 U2.21
  Bottom Layer w0.254: P1.23@36.322,51.225 41.7,45.847 45.466,45.847 46.355,46.736 57.912,46.736 v1(58.42,46.228)
NetP1_24: P1.24 U2.20 | length 36.3
  Top Layer w0.254: P1.24@36.322,53.721 P1.24 ; v1(60.071,46.736) 61.098,45.709 U2.20
  Bottom Layer w0.254: P1.24@36.322,53.721 37.592,52.451 37.592,50.673 41.91,46.355 45.252,46.355 46.141,47.244 59.563,47.244 v1(60.071,46.736)
NetP1_40: P1.40 U2.58 | length 121.9
  Top Layer w0.254: P1.40 56.642,52.705 56.984,52.363 57.11,52.363 57.773,51.7 57.773,50.177 59.69,48.26 64.262,48.26 65.151,49.149 65.151,51.01 66.084,51.943 68.072,51.943 v1(68.58,52.451) ; v1(58.039,20.066) 59.598,21.625 U2.58 ; v1(78.105,47.625) 80.01,45.72 v1(80.01,40.767)
  Bottom Layer w0.254: v1(58.039,20.066) 58.039,17.939 61.576,14.402 62.376,14.402 62.96,14.986 68.104,14.986 68.434,15.316 69.234,15.316 69.799,14.751 69.799,10.846 72.39,8.255 72.39,6.096 72.898,5.588 79.165,5.588 81.407,7.83 81.407,39.37 v1(80.01,40.767) ; v1(68.58,52.451) 68.58,53.721 69.596,54.737 77.343,54.737 78.105,53.975 v1(78.105,47.625)
NetP3_1: P3.1 U2.37 | length 59.1
  Top Layer w0.254: v1(44.45,34.544) 44.45,35.6 45.299,36.449 49.911,36.449 51.022,35.338 U2.37
  Bottom Layer w0.254: v1(44.45,34.544) 44.45,29.718 42.164,27.432 39.37,27.432 37.719,25.781 37.719,23.455 38.481,22.693 38.481,21.209 42.164,17.526 42.331,17.526 42.926,16.931 42.926,2.623 43.517,2.032 49.276,2.032 50.927,3.683 P3.1@50.927,4.699
NetP4_1: P4.1 U2.24 | length 68.3
  Top Layer w0.254: v1(27.305,49.53) 28.702,48.133 34.798,48.133 36.195,49.53 55.499,49.53 56.261,48.768 56.261,47.244 55.753,46.736 55.753,44.958 56.261,44.45 57.15,44.45 59.09,42.51 59.09,42.502 ; U2.24 59.098,42.502
  Bottom Layer w0.254: P4.1 16.129,40.259 25.4,49.53 v1(27.305,49.53)
NetP4_2: P4.2 VR1.1 | length 6.1
  Top Layer w0.254: VR1.1@12.144,34.417 12.144,33.195 13.589,31.75 P4.2
NetR3_2: R3.2 U2.60 | length 8.7
  Top Layer w0.254: R3.2 60.106,20.089 60.106,26.324 60.598,26.816 U2.60
NetR6_2: R6.2 U2.5 | length 12.5
  Top Layer w0.254: U2.5 66.46,31.838 ; 66.46,31.83 67.045,31.83 68.268,30.607 69.719,30.607 70.95,31.838 71.834,31.838 72.557,31.115 75.208,31.115 R6.2
NetR7_2: R7.2 U2.6 | length 14
  Top Layer w0.254: U2.6 67.263,32.338 ; 67.263,32.33 67.282,32.33 68.497,31.115 69.509,31.115 70.104,31.71 70.104,32.552 69.85,32.806 69.85,38.965 R7.2
NetR8_2: R8.2 U2.39 | length 16.1
  Top Layer w0.254: v1(43.053,30.099) 43.053,28.702 R8.2 ; v1(43.053,33.655) 43.18,33.528 45.593,33.528 47.244,35.179 48.26,35.179 49.101,34.338 U2.39
  Bottom Layer w0.254: v1(43.053,30.099) v1(43.053,33.655)
NetR11_2: R11.2 VR1.5 VR2.1 | length 45.7
  Top Layer w0.254: v1(5.08,19.685) 4.445,19.05 4.445,16.256 6.223,14.478 VR2.1 ; v1(11.43,41.91) 12.144,41.196 ; VR1.5@12.144,39.497 12.144,41.196 ; R11.2 13.656,41.196 12.144,41.196
  Bottom Layer w0.254: v1(5.08,19.685) 1.27,23.495 1.27,40.64 2.54,41.91 v1(11.43,41.91)
NRST: C21.2 P2.5 R4.1 S1.1 S1.3 U2.7 | length 76.4
  Top Layer w0.254: U2.7 67.492,32.838 68.199,32.131 v1(69.088,32.131) ; S1.1 70.449,53.685 v1(70.485,53.721) ; v1(70.394,49.185) S1.3 69.467,46.609 C21.2 69.897,46.054 70.981,44.97 R4.1 ; v1(80.01,39.116) 81.28,40.386 81.28,42.037 P2.5
  Bottom Layer w0.254: v1(69.088,32.131) 69.723,31.496 69.723,28.702 71.12,27.305 79.375,27.305 80.01,27.94 v1(80.01,39.116) ; v1(70.485,53.721) 70.485,49.276 v1(70.394,49.185) 70.394,46.954 70.993,46.355 80.645,46.355 81.661,47.371 83.82,47.371 84.455,46.736 84.455,44.45 83.566,43.561 P2.5
RPI_3V3: P1.1 P1.17 P5.3 | length 41.5
  Bottom Layer w0.254: P1.1 10.719,48.895 24.19,48.895 25.232,49.936 26.418,49.936 26.926,50.444 27.915,50.444 P1.17
  Bottom Layer w0.889: P5.3 25.654,45.974 28.702,49.022 P1.17
RPI_GPIO4: P1.7 R1.2 | length 8.9
  Top Layer w0.254: P1.7 17.78,49.454 17.78,47.625 18.427,46.978 R1.2
RPI_SPI0_CE1_N: P1.26 R13.1 | length 10.8
  Top Layer w0.254: 33.389,49.53 33.897,50.038 39.497,50.038 40.132,50.673 40.132,52.502 P1.26
RPI_UART0_RXD: P1.10 R12.1 | length 7
  Top Layer w0.254: P1.10 19.812,52.502 19.812,49.403 20.32,48.895 R12.1
RPI_UART0_TXD: P1.8 R10.1 | length 5.7
  Top Layer w0.254: R10.1 15.228,49.669 14.732,50.165 14.732,52.502 P1.8
SWCLK: P2.2 U2.49 | length 80.7
  Top Layer w0.254: v1(49.53,19.05) 49.53,21.082 55.082,26.634 55.082,26.65 ; 55.098,26.65 U2.49 ; v1(74.295,16.51) 77.47,16.51 81.915,20.955 81.915,38.735 82.55,39.37 82.931,39.37 83.947,40.386 83.947,50.038 P2.2
  Bottom Layer w0.254: v1(49.53,19.05) 50.673,20.193 54.273,20.193 56.178,22.098 64.897,22.098 69.85,17.145 73.66,17.145 v1(74.295,16.51)
SWDIO: P2.4 U2.46 | length 84
  Top Layer w0.254: v1(48.641,22.479) 48.641,22.606 50.8,24.765 v1(50.8,25.4) ; v1(48.895,29.21) 50.038,29.21 51.658,30.83 51.666,30.83 ; 51.666,30.838 U2.46 ; v1(76.2,15.24) 77.47,15.24 82.55,20.32 82.55,36.195 82.931,36.576 v1(82.931,36.83)
  Bottom Layer w0.254: v1(48.641,22.479) 49.276,22.479 51.054,20.701 54.062,20.701 55.967,22.606 65.107,22.606 69.933,17.78 74.93,17.78 76.2,16.51 v1(76.2,15.24) ; v1(48.895,29.21) 48.895,28.575 50.8,26.67 v1(50.8,25.4) ; P2.4 80.899,44.196 80.899,43.307 81.915,42.291 83.566,42.291 83.947,41.91 83.947,39.497 82.931,38.481 v1(82.931,36.83)
SWO: P2.6 U2.55 | length 63.6
  Top Layer w0.254: v1(53.975,19.177) 53.975,21.463 58.098,25.586 U2.55 ; v1(67.31,17.653) 77.724,17.653 81.28,21.209 81.28,39.457 82.804,40.981 P2.6 P2.6@83.185,40.64
  Bottom Layer w0.254: v1(53.975,19.177) 56.388,21.59 64.262,21.59 66.167,19.685 66.167,18.288 66.802,17.653 v1(67.31,17.653)
VCC: C24.1 C25.1 C26.1 C27.1 C28.1 C30.2 C33.1 P2.1 P5.2 R4.2 U2.1 U2.13 U2.19 U2.32 U2.48 U2.64 | length 197.7
  Top Layer w0.254: 33.989,27.733 36.322,25.4 46.816,25.4 C30.2 ; v1(45.085,47.625) 45.085,47.557 C27.1 ; C33.1@51.261,45.513 C33.1 C27.1 ; U2.48 52.317,29.838 47.926,25.447 46.99,25.447 C30.2 ; U2.32@55.065,39.338 50.832,39.338 47.129,43.041 C27.1 ; U2.19 61.598,44.648 C24.1 62.035,46.931 v1(61.976,46.99) 64.516,46.99 ; 62.598,26.683 U2.64 ; 62.606,26.683 62.606,26.675 63.754,25.527 64.723,25.527 ; U2.1 67.35,29.838 C26.1 66.073,29.37 64.723,28.02 64.723,25.527 ; U2.13 65.683,35.838 66.294,36.449 66.294,37.799 C28.1 69.481,42.834 R4.2 66.814,46.99 64.516,46.99 ; P2.1 80.518,53.721 78.232,51.435 66.294,51.435 65.659,50.8 65.659,48.133 64.516,46.99 ; C30.2 46.99,25.32 46.99,23.455 46.863,23.328 46.863,17.224 47.729,16.358 62.371,16.358 64.77,18.756 64.77,24.21 64.723,24.257 64.723,25.527
  Top Layer w0.889: P5.2 28.194,29.337 29.798,27.733 33.989,27.733 ; v1(36.83,46.99) 44.45,46.99 v1(45.085,47.625)
  Bottom Layer w0.254: v1(45.085,47.625) 45.212,47.752 61.214,47.752 v1(61.976,46.99)
  Bottom Layer w0.889: P5.2 28.194,46.228 28.956,46.99 v1(36.83,46.99)
pads on no net: MEMS1.2 MEMS1.3 MEMS1.10 MEMS1.11 MEMS2.7 P1.3 P1.5 P1.11 P1.12 P1.13 P1.15 P1.16 P1.18 P1.22 P1.27 P1.28 P1.29 P1.31 P1.32 P1.33 P1.35 P1.36 P1.37 P1.38 U2.2 U2.3 U2.4 U2.8 U2.14 U2.25 U2.29 U2.35 U2.36 U2.40 U2.43 U2.52 U2.53 U2.54 U2.59 VR2.5

## Polygon pours and split planes (outlines as drawn)
GND on Bottom Layer "Bottom Layer- GND" (solid, pour order 0): 0.635,55.245 84.455,55.245 84.455,0.635 0.635,0.635
GND on Top Layer "Top Layer - GND" (solid, remove dead copper, pour order 2): 0.635,55.245 84.455,55.245 84.455,0.635 0.635,0.635

## Other copper
Top Layer:
  pour cut-out: 41.529,39.243 41.529,34.417 36.195,34.417 36.195,39.243

## Silkscreen, mask and mechanical layers (free items; w line width, h text height)
Mechanical 1:
  lines w0.127: 0,0 0,56.007 85.09,56.007 85.09,0 0,0 ; 44.45,3.175 44.45,19.685 45.72,19.685 45.72,3.175 44.45,3.175

## Text inside footprints (layer, text, board x,y; h text height)
P1: Top Overlay "1" at 6.096,46.228 h1.27; Top Overlay "2" at 5.842,48.133 h1.27; Top Overlay "39" at 63.5,48.387 h1.27; Top Overlay "40" at 63.881,54.483 h1.27